# Altium PCB led.PcbDoc
Units mm, origin at the board's own origin, x right, y up, seen from the top; angles counter-clockwise.
Board outline 10 x 46 mm, 2 copper layers (Top Layer, Bottom Layer); 10 components, 8 nets, 43 pads, 5 vias.
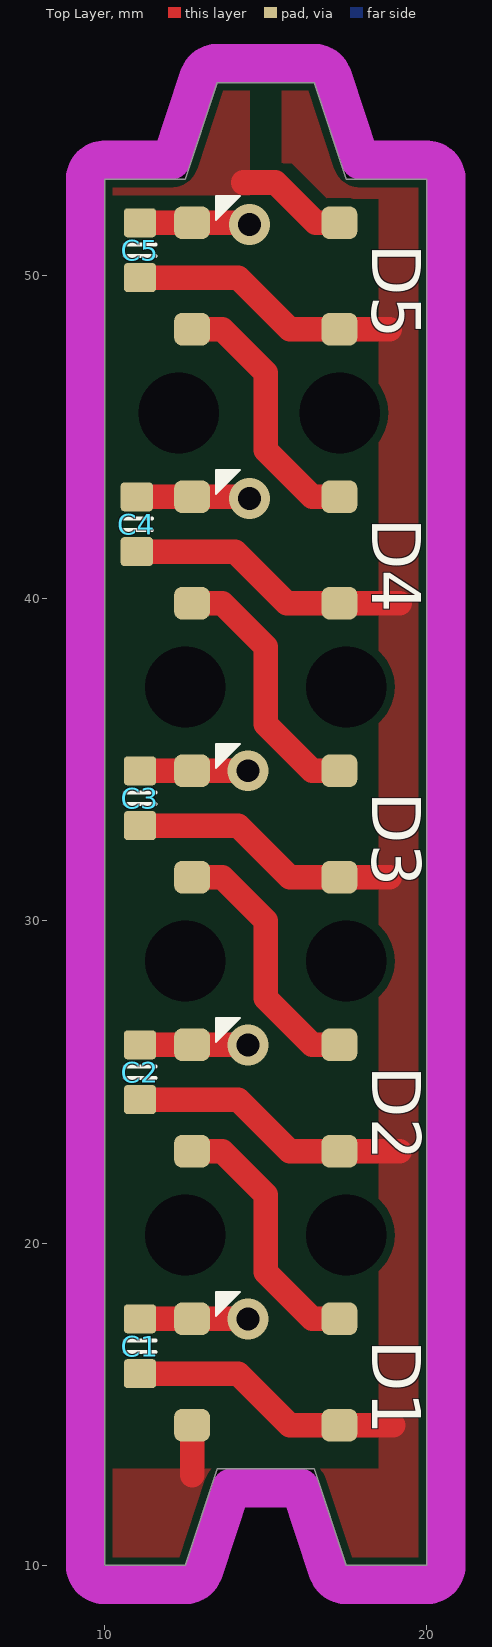
[diagram p0: Top Layer view]
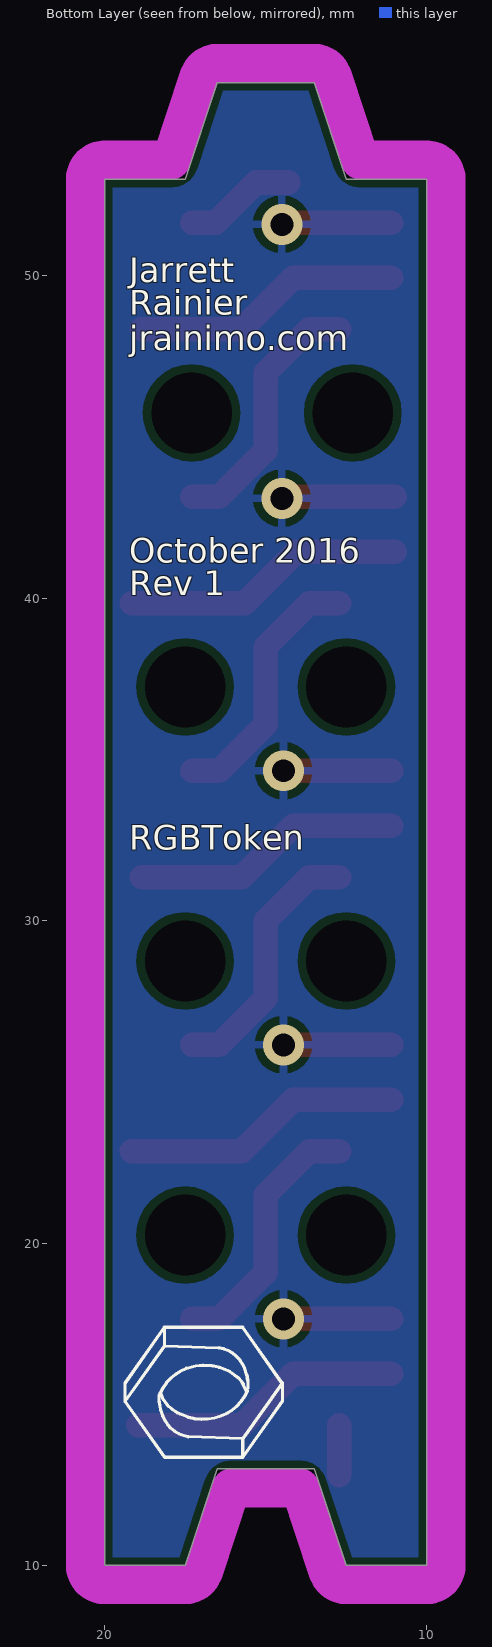
[diagram p1: Bottom Layer view, seen from below]
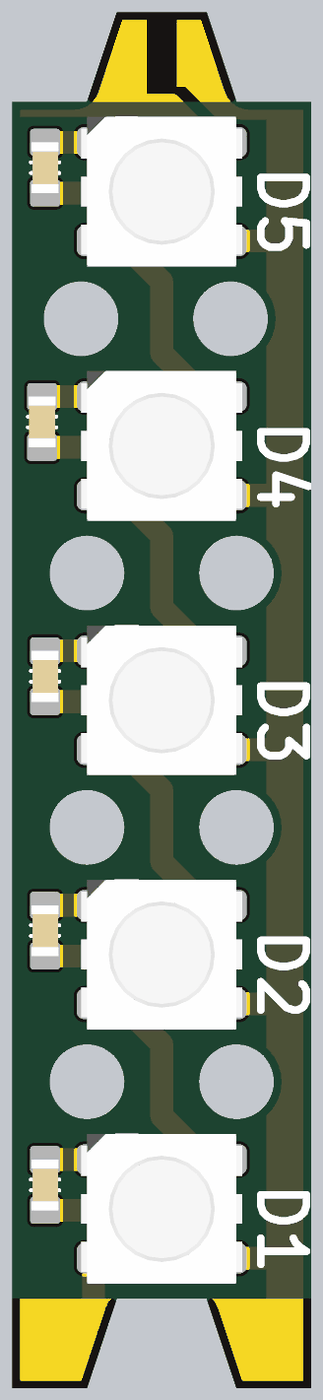
[diagram p2: 3D render of the assembled board from above, using the file's embedded part models]

## Layer stack, top to bottom
Top Layer: signal copper 0.0356
Dielectric: dielectric 0.32, FR-4, Dk 4.8
Bottom Layer: signal copper 0.0356

## Board outline
10,10 12.5,10 13.5,13 16.5,13 17.5,10 20,10 20,53 17.5,53 16.5,56 13.5,56 12.5,53 10,53

## Design rules (kind name [scope] priority, off if disabled: settings)
Clearance [All] p1: gap=0.254
PolygonConnect [All] p1: connectstyle=Relief reliefconductorwidth=0.254 reliefentries=4 polygonreliefangle="90 Angle"
RoutingVias [All] p1: holewidth=0.711 width=1.27 viastyle="Through Hole" minholewidth=0.711 minwidth=1.27 maxholewidth=0.711 maxwidth=1.27
SilkscreenOverComponentPads [All] p1: minsilkscreentomaskgap=0.254
SolderMaskExpansion [All] p1: expansion=0.102
Width [All] p1: maxlimit=1.016 minlimit=0.254 preferedwidth=0.254 bottomlayer_maxwidth=0.254 minimp=50.000000 maximp=50.000000 favimp=50.000000
27 further rules are at their usual default settings.

## Components (designator, comment, footprint, x,y, rotation, side; value= is the part's Value field where it differs from the comment)
C1 "approved sub OK" CAPC1608X90N 11.1,16.8 r90 top
C2 "approved sub OK" CAPC1608X90N 11.1,25.3 r90 top
C3 "approved sub OK" CAPC1608X90N 11.1,33.8 r90 top
C4 "approved sub OK" CAPC1608X90N 11,42.3 r90 top
C5 "approved sub OK" CAPC1608X90N 11.1,50.8 r90 top
D1 "LED_5050_WS2812B" LED_5050_WS2812B 15,16 r180 top
D2 "LED_5050_WS2812B" LED_5050_WS2812B 15,24.5 r180 top
D3 "LED_5050_WS2812B" LED_5050_WS2812B 15,33 r180 top
D4 "LED_5050_WS2812B" LED_5050_WS2812B 15,41.5 r180 top
D5 "LED_5050_WS2812B" LED_5050_WS2812B 15,50 r180 top

## Footprints (in the part's own frame and the unit in brackets; to place one, negate y for a bottom-side part, rotate by r counter-clockwise, add the part's x,y. Pads: shape width x height; smd on the part's side, far side on the other; paste and mask are expansions set on the pad)
CAPC1608X90N [mm] "Chip Capacitor, Body 1.6x0.8mm, EIA 0603, IPC Medium Density"
  round 0.254 on Mech15: 0(0,0)
  rrect25% 0.9x1 smd: 1(-0.85,0) 2(0.85,0)
  Top Layer pour cut-out: -0.6,0.5 -0.4,0.7 0.4,0.7 0.6,0.5 0.6,-0.5 0.4,-0.7 -0.4,-0.7 -0.6,-0.5
  silkscreen extent -0.18,-0.48 0.18,0.48, body extent -0.85,-0.45 0.85,0.45, height 0.89
LED_5050_WS2812B [mil]
  rrect50% 44x40 smd: 1(-90,65) 2(-90,-65) 3(90,-65) 4(90,65)
  silkscreen extent 31,-98 61,-68, body extent -106,-98 106,98, height 69

## Part data
C1 C2 C3 C4 C5: library part CAPC_100n_0603_X7R_50V_10%, "Capacitor SMD Cer 100nF 10% 50V X7R 0603"
D1 D2 D3 D4 D5: "LED"

## Free pads (board coordinates)
  round 0 hole 2.5 unplated: 0(12.3,45.75) 0(12.5,20.25) 0(12.5,28.75) 0(12.5,37.25) 0(17.3,45.75) 0(17.5,20.25) 0(17.5,28.75) 0(17.5,37.25)

## Via types
v1: diameter 1.27, hole 0.711, Top Layer to Bottom Layer, 5 vias

## Nets (pads, with @x,y where several pads share a name; then routed paths per layer and width w, separated by ;. In a path a pad name is that pad's centre, name@x,y a point inside that pad or via, vN(x,y) a via of type N, cw(c..) or ccw(c..) an arc to the next point about the centre after c; other vN are vias at no path point)
GND: C1.2 C2.2 C3.2 C4.2 C5.2 D1.3 D2.3 D3.3 D4.3 D5.3 | length 17.1
  Top Layer w0.762: C4.2 14.55,43.15 v1(14.5,43.1) ; C1.2 D1.3@12.713,17.65 ; C2.2 D2.3@12.713,26.15 ; C3.2 D3.3@12.713,34.65 ; C5.2 D5.3@12.713,51.65 ; D1.3 v1(14.449,17.651) ; D2.3 v1(14.451,26.151) ; D3.3 v1(14.449,34.651) ; D5.3 14.449,51.651 v1(14.5,51.6)
IN: D1.4 | length 1.5
  Top Layer w0.762: 12.714,12.8 D1.4
NetD1_2: D1.2 D2.4 | length 8.1
  Top Layer w0.762: D2.4 13.651,22.849 15,21.5 15,19.1 16.449,17.651 D1.2
NetD2_2: D2.2 D3.4 | length 8.1
  Top Layer w0.762: D3.4 13.651,31.349 15,30 15,27.6 16.449,26.151 D2.2
NetD3_2: D3.2 D4.4 | length 8.1
  Top Layer w0.762: D4.4 13.651,39.849 15,38.5 15,36.1 16.449,34.651 D3.2
NetD4_2: D4.2 D5.4 | length 8.1
  Top Layer w0.762: D5.4 13.651,48.349 15,47 15,44.6 16.449,43.151 D4.2
OUT: D5.2 | length 3.5
  Top Layer w0.762: 14.3,52.9 15.3,52.9 16.549,51.651 D5.2
VDD: C1.1 C2.1 C3.1 C4.1 C5.1 D1.1 D2.1 D3.1 D4.1 D5.1 | length 42.8
  Top Layer w0.762: C4.1 14.05,41.45 15.651,39.849 D4.1@17.186,39.849 ; C1.1 14.15,15.95 15.751,14.349 D1.1 18.949,14.349 ; C2.1 14.15,24.45 15.751,22.849 D2.1 19.149,22.849 ; C3.1 14.15,32.95 15.751,31.349 D3.1 18.851,31.349 ; C5.1 14.15,49.95 15.751,48.349 D5.1 18.851,48.349 ; D4.1 19.151,39.849
pads on no net: C1.0 C2.0 C3.0 C4.0 C5.0

## Polygon pours and split planes (outlines as drawn)
VDD on Top Layer "Bottom Layer-No Net" (solid, pour order 2): 16.5,13 20,13 20,10 17.5,10
IN on Top Layer "Bottom Layer-No Net" (solid, remove dead copper, pour order 4): 13.5,13 10,13 10,10 12.5,10
VDD on Top Layer "Bottom Layer-No Net" (solid, pour order 10): 20,13 20,53 18.5,53 18.5,13
OUT on Top Layer "Bottom Layer-No Net" (solid, pour order 12): 10,52.5 10,53 12.5,53 12.5,55 13.5,56 14.5,56 14.5,52.5
VDD on Top Layer "Bottom Layer-No Net" (solid, pour order 14): 15.5,56 15.5,53.5 15.8,53.5 16.7,52.6 16.9,52.4 18.6,52.4 18.6,52.9 18.5,53 17.5,53 17.5,55.4 16.9,56
GND on Bottom Layer "Bottom Layer-No Net" (solid, pour order 8): 17.5,10 20,10 20,53 17.5,53 17.5,55 16.5,56 13.5,56 13.403,56 12.6,55.197 12.5,55.097 12.5,53 10,53 10,10 12.5,10 13.5,11 13.5,13 15.7,13 16,12.7
no net on Top Solder "Bottom Layer-No Net" (solid): 17.5,10 20,10 20,13 16.5,13
no net on Top Solder "Bottom Layer-No Net" (solid): 12.5,53 17.5,53 16.5,56 13.5,56
no net on Top Solder "Bottom Layer-No Net" (solid): 10,10 10,13 13.5,13 12.5,10
no net on Bottom Solder "Bottom Layer-No Net" (solid): 17.5,10 20,10 20,13 16.5,13
no net on Bottom Solder "Bottom Layer-No Net" (solid): 12.5,53 17.5,53 16.5,56 13.5,56
no net on Bottom Solder "Bottom Layer-No Net" (solid): 10,10 10,13 13.5,13 12.5,10

## Keep-outs
Keep-Out Layer:
  lines w1.2: 12.931,56.19 cw(c13.5,56) 13.5,56.6 ; 17.069,56.19 ccw(c16.5,56) 16.5,56.6 ; 9.4,10 ccw(c10,10) 10,9.4 ; 9.4,10 ccw(c10,10) 10,9.4 ; 9.4,10 9.4,53 ; 9.4,53 cw(c10,53) 10,53.6 ; 9.4,53 cw(c10,53) 10,53.6 ; 10,9.4 12.5,9.4 ; 10,53.6 12.068,53.6 12.93,56.188 cw(c13.5,56) 13.5,56.6 ; 12.5,9.4 ccw(c12.5,10) 13.069,9.81 ; 12.5,9.4 ccw(c12.5,10) 13.07,9.811 ; 13.07,9.811 13.932,12.4 16.068,12.4 16.93,9.811 ; 13.5,56.6 16.5,56.6 ; 16.5,56.6 cw(c16.5,56) 17.07,56.188 17.932,53.6 20,53.6 ; 16.93,9.811 ccw(c17.5,10) 17.5,9.4 ; 16.931,9.81 ccw(c17.5,10) 17.5,9.4 ; 17.5,9.4 20,9.4 ; 20,9.4 ccw(c20,10) 20.6,10 ; 20,9.4 ccw(c20,10) 20.6,10 ; 20,53.6 cw(c20,53) 20.6,53 ; 20,53.6 cw(c20,53) 20.6,53 ; 20.6,10 20.6,53

## Silkscreen, mask and mechanical layers (free items; w line width, h text height)
Bottom Overlay:
  lines w0.1: 14.494,15.653 15.715,17.383 ; 15.552,15.749 15.59,15.916 15.662,16.119 cw(c16.609,15.751) 16.454,16.755 ; 15.557,15.489 15.548,15.556 15.55,15.669 15.572,15.815 ; 15.566,15.428 15.576,15.402 ; 15.57,15.411 ccw(c16.879,15.972) 16.391,14.634 ccw(c16.954,16.178) 17.401,14.597 ; 15.591,15.389 15.73,15.672 ; 15.687,15.62 15.84,15.814 16.107,16.011 16.453,16.152 ; 15.698,13.381 14.482,15.105 14.482,15.665 15.706,13.934 ; 15.708,13.358 18.144,13.358 19.369,15.096 ; 15.708,13.942 15.715,13.942 15.715,13.365 ; 15.711,13.938 15.713,13.938 ; 15.711,17.39 18.147,17.39 ; 15.715,13.938 17.4,14 ; 16.454,16.748 18.14,16.81 19.36,15.095 ; 17.401,13.993 ccw(c17.246,14.997) 18.193,14.63 ; 17.461,16.107 cw(c16.975,14.775) 18.278,15.334 ; 17.463,16.114 17.175,16.19 16.946,16.213 16.663,16.196 16.453,16.152 ; 17.748,14.737 18.014,14.934 18.167,15.128 18.27,15.358 ; 17.905,14.848 17.677,14.709 17.399,14.604 ; 18.129,16.825 18.132,16.825 ; 18.14,17.383 18.14,16.806 18.147,16.806 ; 18.147,17.376 19.363,15.652 ; 18.245,14.794 18.283,14.933 18.305,15.079 ; 18.265,14.832 18.193,14.63 ; 18.289,15.32 18.302,15.275 18.313,15.193 18.314,15.106 ; 19.37,15.069 19.37,15.654 ; 16.453,16.152 16.455,16.145 16.453,16.152 ; 17.399,14.604 17.401,14.597 ; 17.399,14.604 17.401,14.597 ; 17.399,14.604 17.401,14.597 ; 17.399,14.604 17.401,14.597 ; 18.186,14.632 18.193,14.63 ; 18.186,14.632 18.193,14.63 ; 18.186,14.632 18.193,14.63 ; 18.186,14.632 18.193,14.63
  text "Jarrett" at 19.227,49.8 h0.76
  text "Rainier" at 19.227,48.8 h0.76
  text "jrainimo.com" at 19.227,47.7 h0.76
  text "October 2016" at 19.227,41.1 h0.76
  text "Rev 1" at 19.227,40.1 h0.76
  text "RGBToken" at 19.227,32.2 h0.76
Mechanical 1:
  lines w1.2: 9.4,11.5 9.4,51.5 ; 11.3,53.61 12.068,53.61 12.93,56.199 cw(c13.5,56.01) 13.5,56.61 ; 11.5,9.41 12.5,9.41 ; 12.931,56.2 cw(c13.5,56.01) 13.5,56.61 ; 17.069,56.2 ccw(c16.5,56.01) 16.5,56.61 ; 18.6,9.41 17.5,9.41 ; 18.6,53.61 17.932,53.61 17.07,56.199 ccw(c16.5,56.01) 16.5,56.61 ; 20.6,11.6 20.6,51.6 ; 12.5,9.41 ccw(c12.5,10.01) 13.07,9.821 ; 12.5,9.41 ccw(c12.5,10.01) 13.069,9.821 ; 13.07,9.821 13.932,12.41 16.068,12.41 16.931,9.821 ; 13.5,56.61 16.5,56.61 ; 16.931,9.821 ccw(c17.5,10.01) 17.5,9.41 ; 16.931,9.821 ccw(c17.5,10.01) 17.5,9.41 ; 9.4,10.01 ccw(c10,10.01) 10,9.41 cw(c10,10.01) 9.4,10.01 ; 9.4,53.01 cw(c10,53.01) 10,53.61 ccw(c10,53.01) 9.4,53.01 ; 20,9.41 ccw(c20,10.01) 20.6,10.01 cw(c20,10.01) 20,9.41 ; 20,53.61 cw(c20,53.01) 20.6,53.01 ccw(c20,53.01) 20,53.61